# EAGLE board rot-brace (EAGLE 6.3)
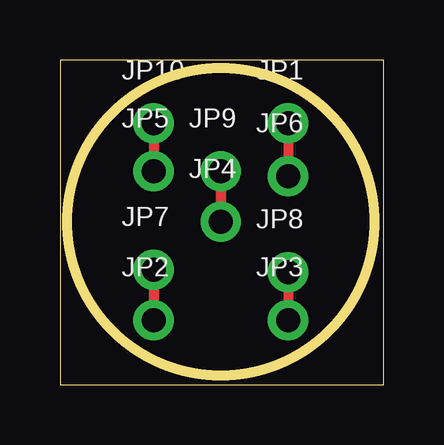
[diagram p0: board, top side]

Size 13.48 x 13.54 mm. Coordinates in mm from the lower left corner, seen from the top.
Outline: 0,0 13.48,0 13.48,13.54 0,13.54 0,0
Outline: circle at 6.7,6.8 radius 6.4
Copper layers (1*16): Top 0.035mm / dielectric 1.5mm / Bottom 0.035mm
Design rules "default": minimum track width 10mil, minimum drill 24mil, track to track 8mil, track to pad 8mil, pad to pad 8mil, via to via 8mil, smd to smd 8mil, copper to edge 40mil, drill to drill 8mil, minimum pad ring 10mil, minimum via ring 8mil, stop-mask expansion 4mil, vias tented up to drill 0mil, thermal gap 10mil

## Footprints (pad centres in the part's own frame; a part is rotated, then mirrored left to right if it is on the bottom)
1X01_ROUND = drill 1 pad 1.676: 1 0,0

## Placement (x,y rotation side)
JP1  [1X01_ROUND]  9.5,10.9 0 top
JP2  [1X01_ROUND]  3.9,2.7 0 top
JP3  [1X01_ROUND]  9.5,2.7 0 top
JP4  [1X01_ROUND]  6.7,6.8 0 top
JP5  [1X01_ROUND]  3.9,8.9 0 top
JP6  [1X01_ROUND]  9.5,8.7 0 top
JP7  [1X01_ROUND]  3.9,4.8 0 top
JP8  [1X01_ROUND]  9.5,4.7 0 top
JP9  [1X01_ROUND]  6.7,8.9 0 top
JP10  [1X01_ROUND]  3.9,10.9 0 top

## Library data of the parts
JP1-JP10 = microbuilder

## Nets
N$1: JP5.1 JP10.1
N$2: JP4.1 JP9.1
N$3: JP3.1 JP8.1
N$4: JP2.1 JP7.1
N$5: JP1.1 JP6.1

## Tracks (layer width: path | path; a pad name or v marks a point on that pad's centre or on a via)
N$1
  Top 0.406: JP10.1 JP5.1
N$2
  Top 0.406: JP9.1 JP4.1
N$3
  Top 0.406: JP8.1 JP3.1
N$4
  Top 0.406: JP7.1 JP2.1
N$5
  Top 0.406: JP1.1 JP6.1